# Altium PCB IO_Board.PcbDoc
Units mm, origin at the board's own origin, x right, y up, seen from the top; angles counter-clockwise.
Board outline 175 x 95 mm, 2 copper layers (Top Layer, Bottom Layer); 142 components, 107 nets, 588 pads, 75 vias.
Unrouted connection lines stored in the file: 5.
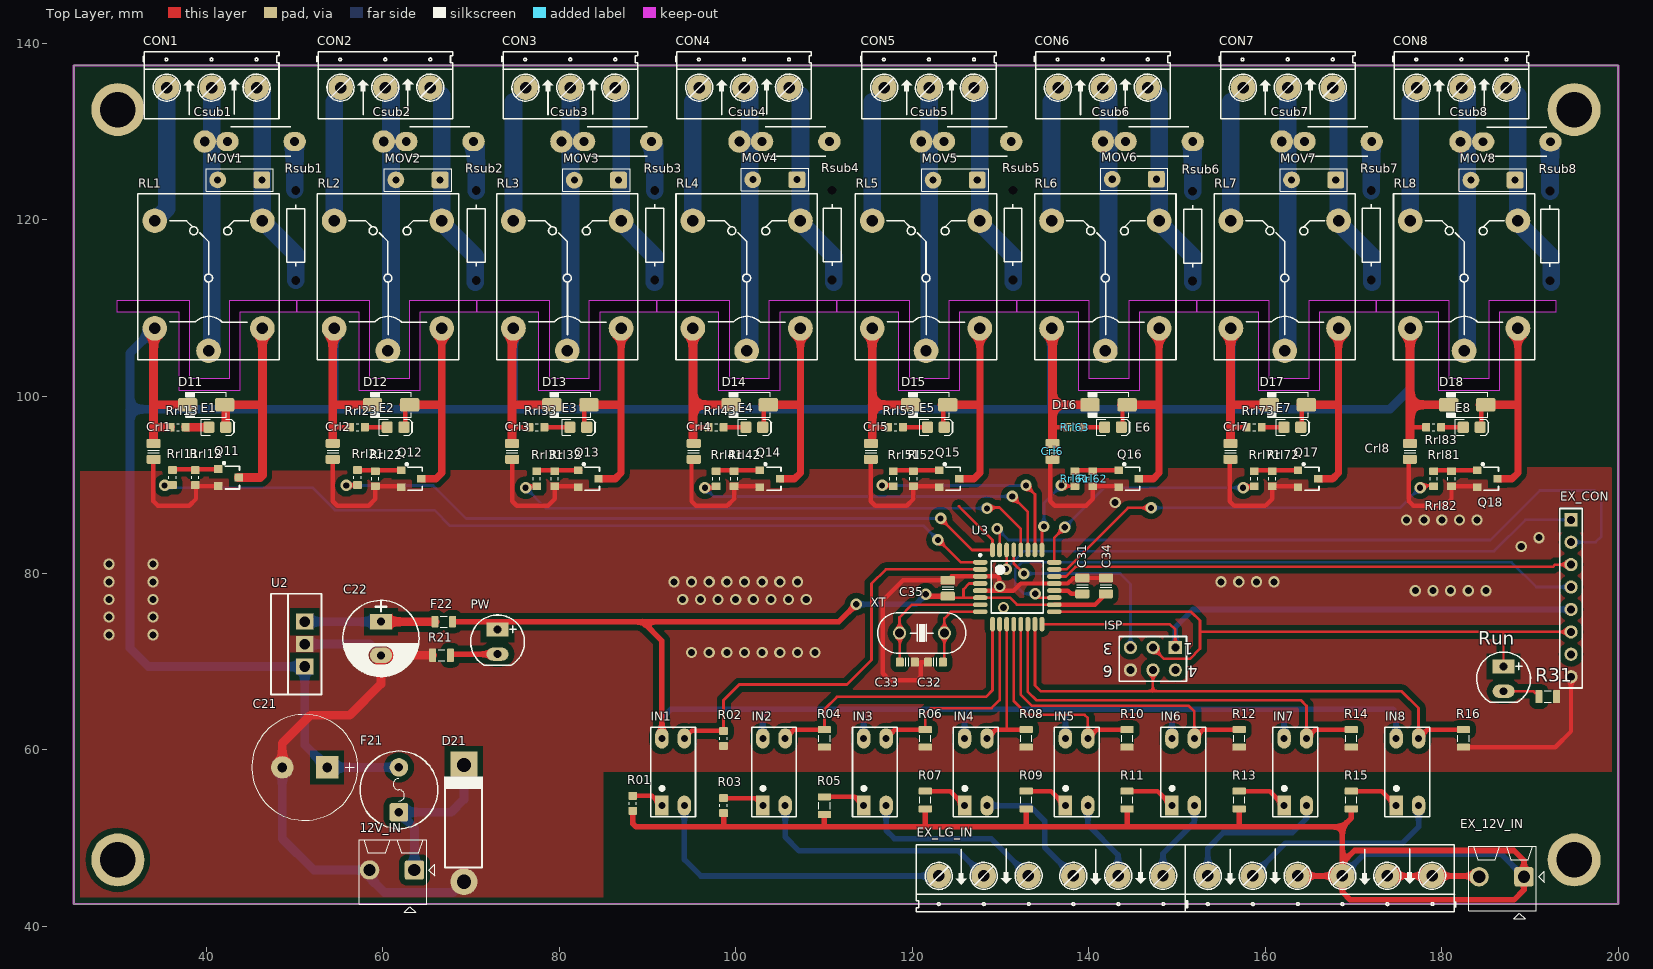
[diagram p0: Top Layer view]
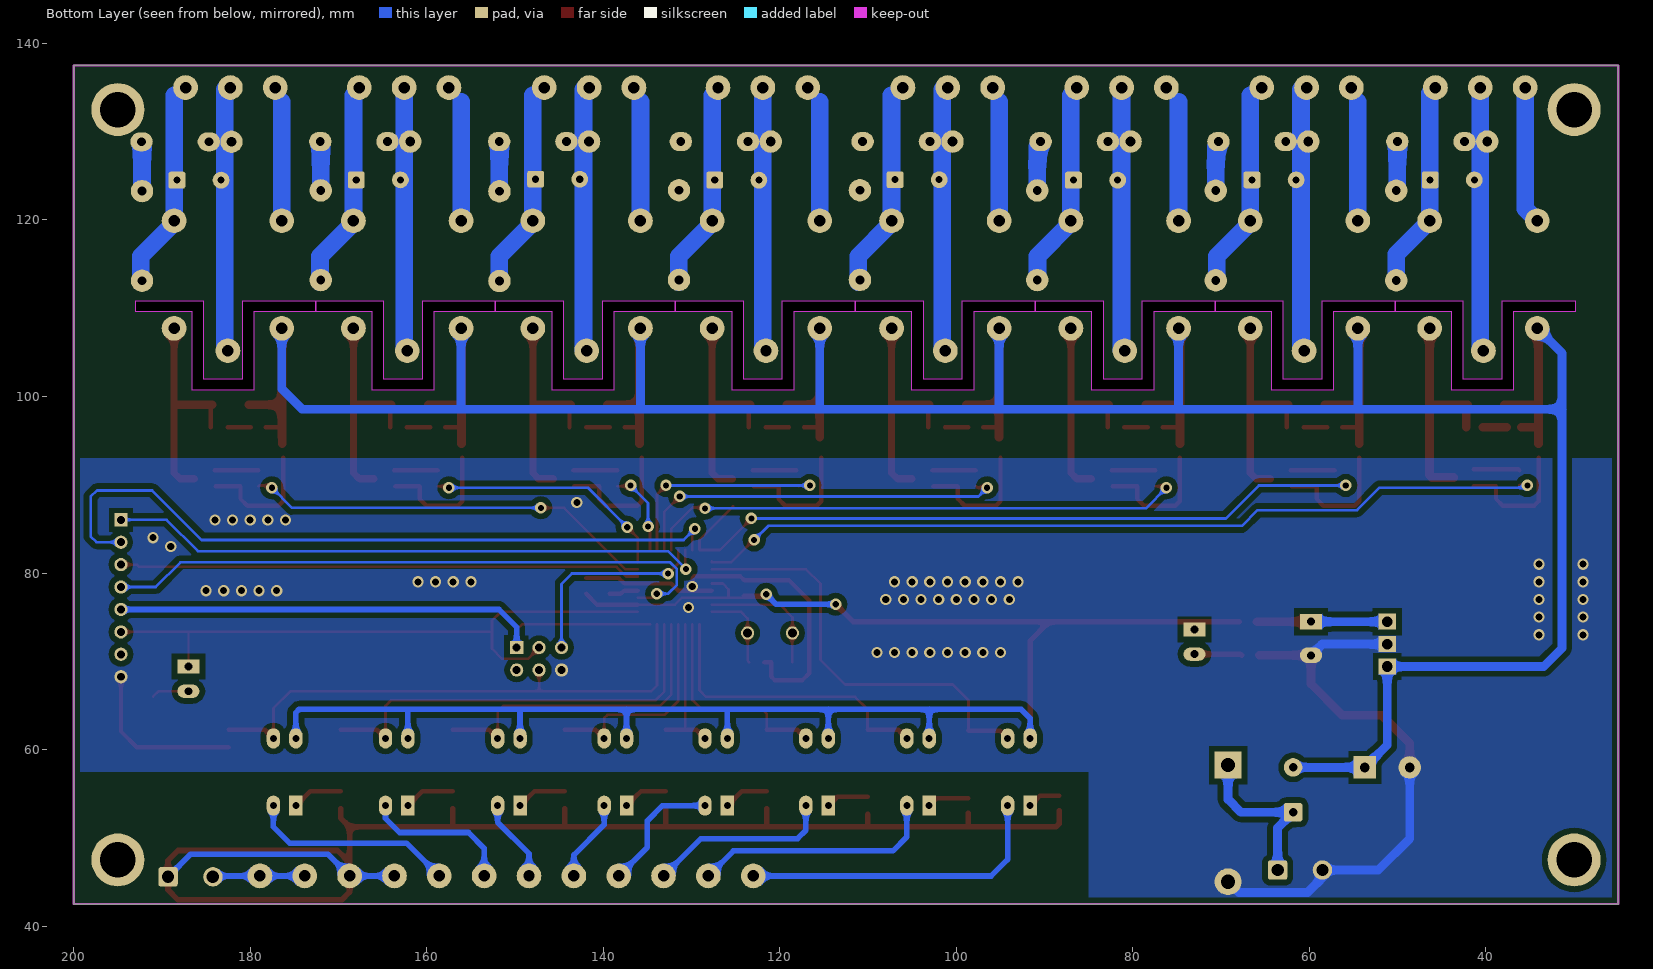
[diagram p1: Bottom Layer view, seen from below]

## Layer stack, top to bottom
Top Solder: solder mask 0.0102, Solder Resist, Dk 3.5
Top Layer: signal copper 0.0356
Dielectric 1: dielectric 0.32, FR-4, Dk 4.8
Bottom Layer: signal copper 0.0356
Bottom Solder: solder mask 0.0102, Solder Resist, Dk 3.5

## Board outline
25,42.5 200,42.5 200,137.5 25,137.5
cut-out: 172.593,109.601 179.578,109.601 179.578,100.711 186.563,100.711 186.563,109.601 192.976,109.601 192.976,110.871 185.293,110.871 185.293,101.981 180.848,101.981 180.848,110.871 172.593,110.871
cut-out: 152.209,109.601 159.195,109.601 159.195,100.711 166.179,100.711 166.179,109.601 172.593,109.601 172.593,110.871 164.909,110.871 164.909,101.981 160.464,101.981 160.464,110.871 152.209,110.871
cut-out: 131.826,109.601 138.811,109.601 138.811,100.711 145.796,100.711 145.796,109.601 152.209,109.601 152.209,110.871 144.526,110.871 144.526,101.981 140.081,101.981 140.081,110.871 131.826,110.871
cut-out: 111.442,109.601 118.427,109.601 118.427,100.711 125.412,100.711 125.412,109.601 131.826,109.601 131.826,110.871 124.142,110.871 124.142,101.981 119.697,101.981 119.697,110.871 111.442,110.871
cut-out: 91.059,109.601 98.044,109.601 98.044,100.711 105.029,100.711 105.029,109.601 111.442,109.601 111.442,110.871 103.759,110.871 103.759,101.981 99.314,101.981 99.314,110.871 91.059,110.871
cut-out: 70.675,109.601 77.66,109.601 77.66,100.711 84.645,100.711 84.645,109.601 91.059,109.601 91.059,110.871 83.376,110.871 83.376,101.981 78.93,101.981 78.93,110.871 70.675,110.871
cut-out: 50.292,109.601 57.277,109.601 57.277,100.711 64.262,100.711 64.262,109.601 70.675,109.601 70.675,110.871 62.992,110.871 62.992,101.981 58.547,101.981 58.547,110.871 50.292,110.871
cut-out: 29.909,109.601 36.893,109.601 36.893,100.711 43.878,100.711 43.878,109.601 50.292,109.601 50.292,110.871 42.608,110.871 42.608,101.981 38.163,101.981 38.163,110.871 29.909,110.871

## Design rules (kind name [scope] priority, off if disabled: settings)
Clearance [All] p1: gap=0.635
PlaneConnect [All] p1: planeconnectstyle=Direct reliefexpansion=0.508 reliefentries=4 reliefconductorwidth=0.635 reliefairgap=0.254
PolygonConnect [All] p1: connectstyle=Direct reliefconductorwidth=0.635 reliefentries=4 polygonreliefangle="90 Angle" airgapwidth=0.254
RoutingVias [All] p1: holewidth=0.711 width=1.27 viastyle="Through Hole" minholewidth=0.6 minwidth=1.2 maxholewidth=5 maxwidth=5
SolderMaskExpansion [All] p1: expansion=0.102
Width [All] p1: maxlimit=3 minlimit=0.254 preferedwidth=0.254
29 further rules are at their usual default settings.

## Components (designator, comment, footprint, x,y, rotation, side; value= is the part's Value field where it differs from the comment)
12V_IN "Stackable ScrewTerm" 2P_PCB_ScrewTerm_200mil 65,42.5 r90 top
C21 "2200uF/35V" CP_1000uF_25V 51.181,57.977 r180 top
C22 "330uF/25V" CP1.5/3.4 59.817,74.487 r270 top
C31 "Cap" CAPC2012N_F 139.268,78.537 r90 top
C32 "CAP NP" CAPC1608N 122.631,69.901 r180 top
C33 "CAP NP" CAPC1608N 119.456,69.901 r0 top
C34 "Cap" CAPC2012N_F 141.935,78.537 r90 top
C35 "Cap" CAPC2012N_F 124.028,78.283 r90 top
CON1 "3P_ScrewTerm_200mil" 3P_ScrewTerm_200mil 33.02,131.445 r0 top
CON2 "3P_ScrewTerm_200mil" 3P_ScrewTerm_200mil 52.705,131.445 r0 top
CON3 "3P_ScrewTerm_200mil" 3P_ScrewTerm_200mil 73.66,131.445 r0 top
CON4 "3P_ScrewTerm_200mil" 3P_ScrewTerm_200mil 93.345,131.445 r0 top
CON5 "3P_ScrewTerm_200mil" 3P_ScrewTerm_200mil 114.3,131.445 r0 top
CON6 "3P_ScrewTerm_200mil" 3P_ScrewTerm_200mil 133.985,131.445 r0 top
CON7 "3P_ScrewTerm_200mil" 3P_ScrewTerm_200mil 154.94,131.445 r0 top
CON8 "3P_ScrewTerm_200mil" 3P_ScrewTerm_200mil 174.625,131.445 r0 top
Crl1 "CAP NP" CAPC2012N_F 34.061,93.777 r270 top
Crl2 "CAP NP" CAPC2012N_F 54.356,93.777 r270 top
Crl3 "CAP NP" CAPC2012N_F 74.676,93.777 r270 top
Crl4 "CAP NP" CAPC2012N_F 95.25,93.777 r270 top
Crl5 "CAP NP" CAPC2012N_F 115.316,93.777 r270 top
Crl6 "CAP NP" CAPC2012N_F 135.89,93.777 r270 top
Crl7 "CAP NP" CAPC2012N_F 156.058,93.777 r270 top
Crl8 "CAP NP" CAPC2012N_F 176.378,93.777 r270 top
Csub1 "CAP NP" CAPMF12.5x4.5x9.0x10mmLS 46.228,128.88 r180 top
Csub2 "CAP NP" CAPMF12.5x4.5x9.0x10mmLS 66.497,128.88 r180 top
Csub3 "CAP NP" CAPMF12.5x4.5x9.0x10mmLS 86.639,128.88 r180 top
Csub4 "CAP NP" CAPMF12.5x4.5x9.0x10mmLS 106.807,128.88 r180 top
Csub5 "CAP NP" CAPMF12.5x4.5x9.0x10mmLS 127.406,128.88 r180 top
Csub6 "CAP NP" CAPMF12.5x4.5x9.0x10mmLS 147.98,128.88 r180 top
Csub7 "CAP NP" CAPMF12.5x4.5x9.0x10mmLS 168.25,128.88 r180 top
Csub8 "CAP NP" CAPMF12.5x4.5x9.0x10mmLS 188.493,128.854 r180 top
D11 "Diode" DO-214AC 40.005,99.06 r180 top
D12 "Diode" DO-214AC 60.96,99.06 r180 top
D13 "Diode" DO-214AC 81.28,99.06 r180 top
D14 "Diode" DO-214AC 101.6,99.06 r180 top
D15 "Diode" DO-214AC 121.92,99.06 r180 top
D16 "Diode" DO-214AC 142.24,99.06 r180 top
D17 "Diode" DO-214AC 162.56,99.06 r180 top
D18 "Diode" DO-214AC 182.88,99.06 r180 top
D21 "Diode" "Diode 3A" 69.215,51.373 r90 top
E1 "Blue" LED-0805-A 41.275,96.52 r0 top
E2 "Blue" LED-0805-A 61.468,96.52 r0 top
E3 "Blue" LED-0805-A 82.169,96.52 r0 top
E4 "Blue" LED-0805-A 102.108,96.52 r0 top
E5 "Blue" LED-0805-A 122.682,96.52 r0 top
E6 "Blue" LED-0805-A 142.748,96.52 r0 top
E7 "Blue" LED-0805-A 163.068,96.52 r0 top
E8 "Blue" LED-0805-A 183.388,96.52 r0 top
EX_12V_IN "Stackable ScrewTerm" 2P_PCB_ScrewTerm_200mil 190.703,41.735 r90 top
EX_CON "Header 8" HDR1X8 194.64,86.03 r270 top
EX_LG_IN "JP12" 12P_ScrewTerm_200mil 181.433,49.235 r180 top
F21 "1.5A" FUSE_SR-5-BK 61.849,55.437 r90 top
F22 "0.5A" RESC2012N_ZERO 66.929,74.487 r0 top
IN1 "PC817" DIP4/W0.3 91.643,53.645 r0 top
IN2 "PC817" DIP4/W0.3 103.073,53.645 r0 top
IN3 "PC817" DIP4/W0.3 114.503,53.645 r0 top
IN4 "PC817" DIP4/W0.3 125.933,53.645 r0 top
IN5 "PC817" DIP4/W0.3 137.363,53.645 r0 top
IN6 "PC817" DIP4/W0.3 149.428,53.645 r0 top
IN7 "PC817" DIP4/W0.3 162.128,53.645 r0 top
IN8 "PC817" DIP4/W0.3 174.828,53.645 r0 top
ISP "Header 3X2A" HDR2X3_CEN 149.809,71.552 r180 top
MOV1 "CAP NP" CAPC500P450250X550 43.815,124.536 r180 top
MOV2 "CAP NP" CAPC500P450250X550 64.008,124.536 r180 top
MOV3 "CAP NP" CAPC500P450250X550 84.226,124.511 r180 top
MOV4 "CAP NP" CAPC500P450250X550 104.445,124.562 r180 top
MOV5 "CAP NP" CAPC500P450250X550 124.866,124.511 r180 top
MOV6 "CAP NP" CAPC500P450250X550 145.161,124.612 r180 top
MOV7 "CAP NP" CAPC500P450250X550 165.481,124.536 r180 top
MOV8 "CAP NP" CAPC500P450250X550 185.801,124.511 r180 top
PW "Led" "LED 5mm RED" 73.025,72.201 r270 top
Q11 "C828" "SOT23 TOP" 42.545,90.805 r270 top
Q12 "C828" "SOT23 TOP" 63.246,90.678 r270 top
Q13 "C828" "SOT23 TOP" 83.312,90.678 r270 top
Q14 "C828" "SOT23 TOP" 103.886,90.678 r270 top
Q15 "C828" "SOT23 TOP" 124.206,90.678 r270 top
Q16 "C828" "SOT23 TOP" 144.526,90.678 r270 top
Q17 "C828" "SOT23 TOP" 164.846,90.678 r270 top
Q18 "C828" "SOT23 TOP" 185.166,90.678 r270 top
R01 "Res" RESC1608N_ZERO 88.341,53.899 r270 top
R02 "Res" RESC1608N_ZERO 98.628,61.265 r90 top
R03 "Res" RESC1608N_ZERO 98.628,53.645 r270 top
R04 "Res" RESC2012N_F 110.058,61.265 r90 top
R05 "Res" RESC2012N_F 110.058,53.645 r270 top
R06 "Res" RESC2012N_F 121.488,61.265 r90 top
R07 "Res" RESC2012N_F 121.488,54.28 r270 top
R08 "Res" RESC2012N_F 132.918,61.265 r90 top
R09 "Res" RESC2012N_F 132.918,54.28 r270 top
R10 "Res" RESC2012N_F 144.348,61.265 r90 top
R11 "Res" RESC2012N_F 144.348,54.28 r270 top
R12 "Res" RESC2012N_F 157.048,61.265 r90 top
R13 "Res" RESC2012N_F 157.048,54.28 r270 top
R14 "Res" RESC2012N_F 169.748,61.265 r90 top
R15 "Res" RESC2012N_F 169.748,54.28 r270 top
R16 "Res" RESC2012N_F 182.448,61.265 r90 top
R21 "Res_0805_1k" RESC2012N_F 66.675,70.677 r180 top
R31 "Res_0805_1k" RESC2012N_F 192,66 r0 top
RL1 "Relay 10A/5V" RL_5PIN 48.26,104.14 r90 top
RL2 "Relay 10A/5V" RL_5PIN 68.58,104.14 r90 top
RL3 "Relay 10A/5V" RL_5PIN 88.9,104.14 r90 top
RL4 "Relay 10A/5V" RL_5PIN 109.22,104.14 r90 top
RL5 "Relay 10A/5V" RL_5PIN 129.54,104.14 r90 top
RL6 "Relay 10A/5V" RL_5PIN 149.86,104.14 r90 top
RL7 "Relay 10A/5V" RL_5PIN 170.18,104.14 r90 top
RL8 "Relay 10A/5V" RL_5PIN 190.5,104.14 r90 top
Rl52 "Res" RESC1608N_ZERO 120.142,90.678 r90 top
Rrl11 "Res" RESC1608N_ZERO 36.195,90.805 r90 top
Rrl12 "Res" RESC1608N_ZERO 38.77,90.805 r90 top
Rrl13 "Res" RESC1608N_ZERO 36.83,96.52 r180 top
Rrl21 "Res" RESC1608N_ZERO 57.15,90.805 r90 top
Rrl22 "Res" RESC1608N_ZERO 59.182,90.678 r90 top
Rrl23 "Res" RESC1608N_ZERO 57.15,96.52 r180 top
Rrl31 "Res" RESC1608N_ZERO 77.47,90.678 r90 top
Rrl32 "Res" RESC1608N_ZERO 79.502,90.678 r90 top
Rrl33 "Res" RESC1608N_ZERO 77.47,96.52 r180 top
Rrl41 "Res" RESC1608N_ZERO 97.79,90.678 r90 top
Rrl42 "Res" RESC1608N_ZERO 99.822,90.678 r90 top
Rrl43 "Res" RESC1608N_ZERO 97.79,96.52 r180 top
Rrl51 "Res" RESC1608N_ZERO 117.856,90.678 r90 top
Rrl53 "Res" RESC1608N_ZERO 118.11,96.52 r180 top
Rrl61 "Res" RESC1608N_ZERO 138.43,90.678 r90 top
Rrl62 "Res" RESC1608N_ZERO 140.462,90.678 r90 top
Rrl63 "Res" RESC1608N_ZERO 138.43,96.52 r180 top
Rrl71 "Res" RESC1608N_ZERO 158.75,90.678 r90 top
Rrl72 "Res" RESC1608N_ZERO 160.782,90.678 r90 top
Rrl73 "Res" RESC1608N_ZERO 158.75,96.52 r180 top
Rrl81 "Res" RESC1608N_ZERO 179.07,90.678 r90 top
Rrl82 "Res" RESC1608N_ZERO 181.102,90.678 r90 top
Rrl83 "Res" RESC1608N_ZERO 179.07,96.52 r180 top
Rsub1 "Res" RESTH_AXIAL-0.4 50.165,118.237 r270 top
Rsub2 "Res" RESTH_AXIAL-0.4 70.612,118.237 r270 top
Rsub3 "Res" RESTH_AXIAL-0.4 90.83,118.262 r270 top
Rsub4 "Res" RESTH_AXIAL-0.4 110.922,118.288 r270 top
Rsub5 "Res" RESTH_AXIAL-0.4 131.42,118.288 r270 top
Rsub6 "Res" RESTH_AXIAL-0.4 151.765,118.161 r270 top
Rsub7 "Res" RESTH_AXIAL-0.4 172.009,118.262 r270 top
Rsub8 "Res" RESTH_AXIAL-0.4 192.253,118.186 r270 top
Run "Led" "LED 5mm RED" 187,68 r270 top
U2 "LM7805" TO-220 51.181,71.947 r90 top
U3 "ATmega88PA" 32PIN 131.902,78.41 r0 top
XT "20MHz" XT2 121.107,73.203 r0 top

## Footprints (in the part's own frame and the unit in brackets; to place one, negate y for a bottom-side part, rotate by r counter-clockwise, add the part's x,y. Pads: shape width x height; smd on the part's side, far side on the other; paste and mask are expansions set on the pad)
2P_PCB_ScrewTerm_200mil [mm]
  rrect25% 2.2x2.2 hole 1.4: 1(3.85,1.397)
  round 2.2 hole 1.4: 2(3.85,6.477)
  silkscreen extent -0.93,-0.89 7.3,7.66, body extent 0,0 7.3,7.62, height 8.5
3P_ScrewTerm_200mil [mil]
  round 110 hole 51.18: 1(100,140) 2(300,140) 3(500,140)
  silkscreen extent -6,0 600,300, body extent 5,0 595,295, height 394
12P_ScrewTerm_200mil [mil]
  round 110 hole 51.18: 1(100,140) 2(300,140) 3(500,140) 4(700,140) 5(900,140) 6(1100,140) 7(1300,140) 8(1500,140) 9(1700,140) 10(1900,140) 11(2100,140) 12(2300,140)
  silkscreen extent -6,0 2400,300, body extent 5,0 2395,295, height 394
32PIN [mm]
  oval 1.65x0.55 smd: 1(-4.2,2.8) 2(-4.2,2) 3(-4.2,1.2) 4(-4.2,0.4) 5(-4.2,-0.4) 6(-4.2,-1.2) 7(-4.2,-2) 8(-4.2,-2.8) 17(4.2,-2.8) 18(4.2,-2) 19(4.2,-1.2) 20(4.2,-0.4) 21(4.2,0.4) 22(4.2,1.2) 23(4.2,2) 24(4.2,2.8)
  oval 0.55x1.65 smd: 9(-2.8,-4.2) 10(-2,-4.2) 11(-1.2,-4.2) 12(-0.4,-4.2) 13(0.4,-4.2) 14(1.2,-4.2) 15(2,-4.2) 16(2.8,-4.2) 25(2.8,4.2) 26(2,4.2) 27(1.2,4.2) 28(0.4,4.2) 29(-0.4,4.2) 30(-1.2,4.2) 31(-2,4.2) 32(-2.8,4.2)
  silkscreen extent -4.32,-2.95 2.95,3.75, body extent -4.5,-4.5 4.5,4.5, height 1.6
CAPC500P450250X550 [mm] "TDK FK24 radial ceramic capacitor"
  round 0.508 on Mech14: 0(0,0)
  rrect25% 1.905x1.905 hole 0.8: 1(-2.5,0)
  round 1.905 hole 0.8: 2(2.5,0)
  silkscreen extent -3.81,-1.27 3.81,1.27, body extent -2.8,-1 2.8,1, height 5.47
CAPC1608N [mm] "Chip Capacitor, Body 1.6x0.8mm, 0603, IPC Medium Density"
  round 0.254 on Mech14: 0(0,0)
  rrect25% 0.9x1 smd: 1(-0.85,0) 2(0.85,0)
  Top Layer pour cut-out: -0.4,0.6 0.4,0.6 0.4,-0.6 -0.4,-0.6
  silkscreen extent -0.18,-0.48 0.18,0.48, body extent -0.85,-0.45 0.85,0.45, height 0.89
CAPC2012N_F [mm] "Chip Capacitor, Body 2.0x1.2mm, 0805, IPC Medium Density, for Flex circuits"
  round 0.254 on Mech14: 0(0,0)
  rrect25% 1.2x1.4 on Top Solder: 1(-0.9,0) 1(0.9,0)
  rrect25% 1x1.6 smd paste-1: 1(-0.9,0) 2(0.9,0)
  rrect25% 1x1.4 on Top Paste: 1(-0.9,0) 1(0.9,0)
  Top Layer pour cut-out: -0.4,0.8 0.4,0.8 0.4,-0.8 -0.4,-0.8
  silkscreen extent -0.15,-0.65 0.15,0.65, body extent -1.1,-0.72 1.1,0.73, height 1.34
CAPMF12.5x4.5x9.0x10mmLS [mm] "Capacitor, MF, Thru-Hole, Dipped Radial; Body 12.5 x 4.5 x 9.0 mm (WxTxH) Pin Spacing 10.0 mm (typ)"
  oval 2.54x2.159 hole 1: 1(-3.81,0) 2(3.81,0)
  round 2.54 hole 1.1: 2(6.375,0)
  silkscreen extent -3.37,-1.65 3.43,1.65, body extent -4.98,-2.25 7.52,2.25, height 9
CP1.5/3.4 [mm] "Tu hoa 220->470uF,16V, 470uF/16V,25V"
  rect 1.778x2.54 hole 0.9: 1(0,0)
  oval 1.778x2.54 hole 0.9: 2(3.81,0)
  silkscreen extent -2.41,-4.32 6.22,4.32, body extent -2.16,-4 5.84,4, height 11.33
CP_1000uF_25V [mm]
  rect 2.54x2.54 hole 1.1: 1(-2.54,0)
  round 2.54 hole 1.1: 2(2.54,0)
  silkscreen extent -6,-6 6,6, body extent -6,-6 6.02,6, height 20.1
"Diode 3A" [mil] "Diode Schottky 1N5822"
  round 120 hole 62.99: 1(-250,0)
  rect 120x120 hole 62.99: 2(270,0)
  silkscreen extent -186,-85 219,90, body extent -321,-104 321,104, height 248
DIP4/W0.3 [mil] "PC817"
  rect 60x90 hole 31.5: 1(0,0)
  oval 60x90 hole 31.5: 2(100,0) 3(100,300) 4(0,300)
  silkscreen extent -50,-50 150,350, body extent -40,-5 140,305, height 169
DO-214AC [mm] "JEDEC DO214 variation AC. SMA"
  round 0.508 on Mech14: 0(0,0)
  rrect25% 2.2x1.5 smd: A(-2.1,0) K(2.1,0)
  silkscreen extent -2.3,-1.4 2.3,1.4, body extent -2.6,-1.3 2.6,1.3, height 2.42
FUSE_SR-5-BK [mm]
  round 0.5 on Mech14: 0(0,0)
  rrect25% 2.1x2.1 hole 0.965: 1(-2.54,0)
  round 2.1 hole 0.965: 2(2.54,0)
  silkscreen extent -4.4,-4.4 4.4,4.4, body extent -4.35,-4.32 4.35,4.32, height 8.29
HDR1X8 [mm] "Connector; Header; 8 Position"
  rect 1.5x1.5 hole 0.9: 1(0,0)
  round 1.5 hole 0.9: 2(2.54,0) 3(5.08,0) 4(7.62,0) 5(10.16,0) 6(12.7,0) 7(15.24,0) 8(17.78,0)
  silkscreen extent -1.27,-1.27 19.05,1.27, body extent -1.27,-1.27 19.05,1.27, height 7
HDR2X3_CEN [mm] "Connector; Header; 3x2 Position"
  rect 1.5x1.5 hole 0.9: 1(0,0)
  round 1.5 hole 0.9: 2(2.54,0) 3(5.08,0) 4(0,2.54) 5(2.54,2.54) 6(5.08,2.54)
  silkscreen extent -1.27,-1.27 6.35,3.81
"LED 5mm RED" [mm]
  rect 1.6x2.5 hole 0.9: A(-1.397,0)
  oval 1.5x2.5 hole 0.9: K(1.397,0)
  silkscreen extent -3.04,-3.05 2.64,3.04, body extent -2.94,-2.97 2.48,3.05, height 12.31
LED-0805-A [mil]
  round 20 on Mech14: 0(0,0)
  rrect25% 50x50 smd: A(-37.5,0) K(37.5,0)
  Top Layer pour cut-out: -15,30 15,30 15,-30 -15,-30
  silkscreen extent -72,-35 77,35, body extent -39,-25 39,25, height 31
RESC1608N_ZERO [mm] "Chip Resistor, Body 1.6x0.8mm, 0603, IPC Medium Density"
  round 0.254 on Mech14: 0(0,0)
  rrect25% 0.9x1 smd: 1(-0.85,0) 2(0.85,0)
  Top Layer pour cut-out: -0.4,0.6 0.4,0.6 0.4,-0.6 -0.4,-0.6
  silkscreen extent -0.15,-0.41 0.15,0.41, body extent -0.87,-0.47 0.88,0.48, height 0.54
RESC2012N_F [mm] "Chip Resistor, Body 2.0x1.2mm, 0805, IPC Medium Density"
  round 0.254 on Mech14: 0(0,0)
  rrect25% 1x1.3 on Top Solder: 1(-1,0) 1(1,0)
  rrect25% 0.8x1.5 smd paste-1: 1(-1,0) 2(1,0)
  rrect25% 0.8x1.3 on Top Paste: 1(-1,0) 1(1,0)
  Top Layer pour cut-out: -0.6,0.75 0.6,0.75 0.6,-0.75 -0.6,-0.75
  silkscreen extent -0.38,-0.64 0.38,0.64, body extent -1.1,-0.67 1.1,0.68, height 0.69
RESC2012N_ZERO [mm] "Chip Resistor, Body 2.0x1.2mm, 0805, IPC Medium Density"
  round 0.254 on Mech14: 0(0,0)
  rrect25% 0.8x1.3 smd: 1(-1,0) 2(1,0)
  Top Layer pour cut-out: -0.6,0.75 0.6,0.75 0.6,-0.75 -0.6,-0.75
  silkscreen extent -0.38,-0.64 0.38,0.64, body extent -1.1,-0.67 1.1,0.68, height 0.69
RESTH_AXIAL-0.4 [mm]
  round 0 / inner round 0 / far side round 2.54 hole 1 unplated: 1(-5.08,0) 2(5.08,0)
  silkscreen extent -3.5,-1.02 3.5,1.02, body extent -5.38,-1.28 5.38,1.28, height 2.6
RL_5PIN [mm]
  round 2.8 hole 1.3: 1(1.041,7.976) 2(15.773,14.072) 3(15.773,1.88) 4(3.581,1.88) 5(3.581,14.072)
  silkscreen extent 0.03,-0.03 18.82,15.98, body extent -0.18,0.2 18.82,15.7, height 15.5
"SOT23 TOP" [mm]
  rect 0.9x0.95 smd: 1(-0.965,-1.143) 2(0,1.143) 3(0.965,-1.143)
  silkscreen extent -1.77,-0.63 1.3,1.25, body extent -1.46,-1.17 1.46,1.17, height 1
TO-220 [mm]
  rect 1.8x2 hole 1.2: 1(-2.54,0) 2(0,0) 3(2.54,0)
  silkscreen extent -5.71,-1.91 5.71,3.81, body extent -4.92,-2.13 4.98,2.37, height 8.08
XT2 [mm]
  round 1.5 hole 1: 1(-2.54,0) 2(2.54,0)
  silkscreen extent -5.03,-2.29 4.96,2.29, body extent -5.93,-2.36 5.42,2.29, height 3.5

## Part data
12V_IN EX_12V_IN: library part 2P_ScrewTerm_90S_3.81MM, "Terminal Block Screw Type THT 2-Position 3.81mm pitch"
C21 C22: library part CP4, "Cap 1000uF/16V - 220uF/50V"
E1 E2 E3 E4 E5 E6 E7 E8: library part LED_SMD_Blue_0805_100mcd, "LED 0805 SMD Blue 100mcd 470nm"
EX_CON: "Header, 8-Pin"
EX_LG_IN: library part Con12, "Connector 12"
F21 F22: library part Fuse
IN1 IN2 IN3 IN4 IN5 IN6 IN7 IN8: library part Opto
ISP: "Header, 3-Pin, Dual row"
Q11 Q12 Q13 Q14 Q15 Q16 Q17 Q18: library part NPN, "Transistor C828 C1815...."
R21 R31: library part Res
RL1 RL2 RL3 RL4 RL5 RL6 RL7 RL8: library part "Relay 1", "Relay SPDT,10A - 12VDC 5 Pin"
U2: library part LM78xx
U3: library part ATmega48/168/328, "ATmega48/168/328"
XT: library part Crystal

## Free pads (board coordinates)
  round 6 hole 4: 0(195,132.5) 1(195,47.5) 2(30,132.5) 3(30,47.5)

## Via types
v1: diameter 1.27, hole 0.8, Top Layer to Bottom Layer, tented both sides, 53 vias
v2: diameter 1.3, hole 0.7, Top Layer to Bottom Layer, 22 vias

## Nets (pads, with @x,y where several pads share a name; then routed paths per layer and width w, separated by ;. In a path a pad name is that pad's centre, name@x,y a point inside that pad or via, vN(x,y) a via of type N, cw(c..) or ccw(c..) an arc to the next point about the centre after c; other vN are vias at no path point)
+5V: C22.1 F22.1 U2.3 | length 14.7
  Top Layer w1: C22.1 F22.1
  Bottom Layer w1: U2.3 C22.1
+12_EX: EX_12V_IN.1 EX_LG_IN.3 EX_LG_IN.4 R01.2 R03.2 R05.2 R07.2 R09.2 R11.2 R13.2 R15.2 | length 182.3
  Top Layer w0.635: R01.2 88.341,51.613 88.721,51.233 110.185,51.233 ; 98.628,51.36 R03.2 ; R05.2 110.058,51.36 110.185,51.233 ; R07.2 121.488,51.36 121.615,51.233 ; R09.2 132.918,51.36 132.791,51.233 ; R11.2 144.348,51.36 144.221,51.233 ; R13.2 157.048,51.36 157.175,51.233 ; EX_LG_IN.4 EX_LG_IN.3 ; R15.2 169.748,52.248 168.733,51.233 ; 110.185,51.233 121.615,51.233 ; 121.615,51.233 132.791,51.233 ; 132.791,51.233 144.221,51.233 ; 144.221,51.233 157.175,51.233 ; 157.175,51.233 168.733,51.233 ; EX_LG_IN.3 168.733,47.169 ; EX_LG_IN.3 168.733,43.865 169.621,42.977 188.163,42.977 189.306,44.12 EX_12V_IN.1 189.306,47.422 188.163,48.565 170.129,48.565 168.733,47.169 ; 168.733,47.169 168.733,51.233
  Bottom Layer w0.635: EX_LG_IN.4 EX_LG_IN.3 171.187,48.133 186.758,48.133 EX_12V_IN.1
+12V: C21.1 Crl1.1@34.061,94.677 Crl2.1@54.356,94.677 Crl3.1@74.676,94.677 Crl4.1@95.25,94.677 Crl5.1@115.316,94.677 Crl6.1@135.89,94.677 Crl7.1@156.058,94.677 Crl8.1@176.378,94.677 D11.K D12.K D13.K D14.K D15.K D16.K D17.K D18.K F21.2 RL1.5 RL2.5 RL3.5 RL4.5 RL5.5 RL6.5 RL7.5 RL8.5 Rrl13.2 Rrl23.2 Rrl33.2 Rrl43.2 Rrl53.2 Rrl63.2 Rrl73.2 Rrl83.2 U2.1 | length 445.9
  Top Layer w0.5: 54.508,96.52 Rrl23.2 ; 74.828,96.52 Rrl33.2 ; 95.148,96.52 Rrl43.2 ; 115.468,96.52 Rrl53.2 ; 135.89,96.52 Rrl63.2 ; 156.108,96.52 Rrl73.2 ; 176.428,96.52 Rrl83.2
  Top Layer w1: Crl1.1@34.061,94.677 34.061,107.594 RL1.5 ; 34.188,96.52 Rrl13.2 ; 34.188,99.06 D11.K ; Crl2.1@54.356,94.677 54.356,107.569 RL2.5 ; 54.508,99.06 D12.K@58.225,99.06 ; Crl3.1@74.676,94.677 74.676,107.569 RL3.5 ; 74.828,99.06 D13.K@78.545,99.06 ; 95.148,95.402 95.148,96.52 95.148,99.06 ; RL4.5 95.148,99.06 ; D14.K@98.865,99.06 95.148,99.06 ; 115.468,95.402 115.468,96.52 115.468,99.06 ; RL5.5 115.468,99.06 ; D15.K@119.185,99.06 115.468,99.06 ; RL6.5 135.89,107.62 135.89,99.06 ; Crl6.1@135.89,94.677 135.89,96.52 135.89,99.06 ; D16.K@139.505,99.06 135.89,99.06 ; Crl7.1@156.058,94.677 156.058,107.671 RL7.5 ; 156.108,99.06 D17.K@159.825,99.06 ; Crl8.1@176.378,94.677 RL8.5@176.378,107.671 ; 176.428,95.402 176.428,96.52 176.428,99.06 ; RL8.5 176.428,99.06 ; D18.K@180.145,99.06 176.428,99.06
  Bottom Layer w1: RL1.5 31.369,104.902 31.369,98.552 ; RL2.5 54.508,98.654 54.61,98.552 ; F21.2 C21.1 51.181,60.517 U2.1 33.463,69.407 31.369,71.501 31.369,98.552 ; RL3.5 74.828,98.577 74.803,98.552 ; RL4.5 95.148,98.654 95.25,98.552 ; RL5.5 115.468,98.577 115.443,98.552 ; RL6.5 135.788,98.577 135.814,98.552 ; 156.108,98.654 RL7.5 ; RL8.5 176.428,100.863 174.117,98.552 135.814,98.552 ; 31.369,98.552 54.61,98.552 ; 54.61,98.552 74.803,98.552 ; 74.803,98.552 95.25,98.552 ; 95.25,98.552 115.443,98.552 ; 115.443,98.552 135.814,98.552
ADC6: EX_CON.4 U3.19 | length 71.3
  Top Layer w0.305: v2(133.934,77.648) 134.372,77.21 U3.19
  Bottom Layer w0.305: v2(133.934,77.648) 132.664,77.648 131.659,78.653 131.659,80.452 132.41,81.204 187.909,81.204 190.703,78.41 EX_CON.4
ADC7: EX_CON.3 U3.22 | length 59.1
  Top Layer w0.305: U3.22 137.42,79.61 138.506,80.696 192.583,80.696 192.837,80.95 EX_CON.3
AREF: C31.1@139.268,77.637 U3.20 | length 3.3
  Top Layer w0.5: U3.20 137.636,78.01 138.009,77.637 C31.1@139.268,77.637
EX_IN_1: EX_LG_IN.12 IN1.2 | length 35.7
  Bottom Layer w0.635: IN1.2 94.183,47.549 96.053,45.679 EX_LG_IN.12
EX_IN_2: EX_LG_IN.11 IN2.2 | length 27.9
  Bottom Layer w0.635: IN2.2 105.613,50.089 107.188,48.514 125.258,48.514 EX_LG_IN.11
EX_IN_3: EX_LG_IN.10 IN3.2 | length 21.1
  Bottom Layer w0.635: IN3.2 117.043,50.851 117.983,49.911 128.941,49.911 EX_LG_IN.10
EX_IN_4: EX_LG_IN.9 IN4.2 | length 14.8
  Bottom Layer w0.635: IN4.2 133.299,53.645 135.019,51.925 135.019,48.913 EX_LG_IN.9
EX_IN_5: EX_LG_IN.8 IN5.2 | length 9.4
  Bottom Layer w0.635: IN5.2 139.903,51.486 143.333,48.056 EX_LG_IN.8
EX_IN_6: EX_LG_IN.7 IN6.2 | length 9.4
  Bottom Layer w0.635: EX_LG_IN.7 148.413,48.21 151.968,51.765 IN6.2
EX_IN_7: EX_LG_IN.6 IN7.2 | length 17.2
  Bottom Layer w0.635: EX_LG_IN.6 153.493,48.82 155.27,50.597 163.068,50.597 164.668,52.197 IN7.2
EX_IN_8: EX_LG_IN.5 IN8.2 | length 23.5
  Bottom Layer w0.635: EX_LG_IN.5 162.297,49.403 175.539,49.403 177.368,51.232 IN8.2
GND: 12V_IN.2 C21.2 C22.2 C31.2 C32.2 C33.2 C34.2 C35.2 Crl1.2 Crl2.2 Crl3.2 Crl4.2 Crl5.2 Crl6.2 Crl7.2 Crl8.2 D21.1 EX_CON.8 ISP.6 Q11.3 Q12.3 Q13.3 Q14.3 Q15.3 Q16.3 Q17.3 Q18.3 R02.1 R04.1@110.058,60.265 R06.1@121.488,60.265 R08.1@132.918,60.265 R10.1@144.348,60.265 R12.1@157.048,60.265 R14.1@169.748,60.265 R16.1@182.448,60.265 R21.2 R31.2 Rl52.1 Rrl12.1 Rrl22.1 Rrl32.1 Rrl42.1 Rrl62.1 Rrl72.1 Rrl82.1 U2.2 U3.3 U3.5 U3.21 | length 248.4
  Top Layer w0.5: Crl1.2@34.036,93.08 34.036,88.138 34.544,87.63 38.1,87.63 38.862,88.392 38.862,89.817 38.885,89.84 Q11.3 ; Crl2.2@54.356,93.08 54.356,88.138 54.864,87.63 58.42,87.63 59.182,88.392 Rrl22.1 Q12.3@61.988,89.828 ; Crl3.2@74.676,93.08 74.676,88.138 75.184,87.63 78.74,87.63 79.502,88.392 Rrl32.1 Q13.3@82.308,89.828 ; Crl4.2@94.996,93.08 94.996,88.138 95.504,87.63 99.06,87.63 99.822,88.392 Rrl42.1 Q14.3@102.628,89.828 ; Crl5.2@115.316,93.08 115.316,88.138 115.824,87.63 119.38,87.63 120.142,88.392 Rl52.1 Q15.3@122.948,89.828 ; C32.2 120.98,69.901 120.98,68.25 120.599,67.869 117.424,67.869 116.662,68.631 116.662,76.886 118.959,79.183 C35.2 124.455,79.61 U3.3 129.686,79.61 129.87,79.426 v1@129.87,78.01 ; U3.5 v1@129.87,78.01 ; Crl6.2@135.636,93.08 135.636,88.138 136.144,87.63 139.7,87.63 140.462,88.392 Rrl62.1 Q16.3@143.268,89.828 ; C34.2 C31.2 138.263,79.437 137.636,78.81 U3.21 132.302,78.81 131.502,78.01 v1@129.87,78.01 ; Crl7.2@155.956,93.08 155.956,88.138 156.464,87.63 160.02,87.63 160.782,88.392 Rrl72.1 Q17.3@163.588,89.828 ; Crl8.2@176.276,93.08 176.276,88.138 176.784,87.63 180.34,87.63 181.102,88.392 Rrl82.1 Q18.3@183.908,89.828 ; R16.1@182.448,60.265 192.853,60.265 194.64,62.052 EX_CON.8
  Top Layer w1: C21.2 48.641,60.706 51.816,63.881 56.261,63.881 59.817,67.437 C22.2 R21.2
  Bottom Layer w1: C21.2 48.641,49.911 52.202,46.35 12V_IN.2 58.523,45.49 60.198,43.815 68.007,43.815 D21.1 ; U2.2 58.547,71.947 C22.2
  other v1: 95,71 97,71 99,71 101,71 103,71 105,71 107,71 109,71 29,73 34,73 29,75 34,75 130.327,76.098 29,77 34,77 94,77 96,77 98,77 100,77 102,77 104,77 106,77 108,77 177,78 179,78 181,78 183,78 185,78 129.921,78.461 29,79 34,79 93,79 95,79 97,79 99,79 101,79 103,79 105,79 107,79 155,79 157,79 159,79 161,79 29,81 34,81 189,83 191,84 176,86 178,86 180,86 182,86 184,86 143,88
GND_EX: EX_12V_IN.2 EX_LG_IN.1 EX_LG_IN.2 | length 20.8
  Top Layer w0.635: EX_LG_IN.2 EX_LG_IN.1 184.132,45.679 EX_12V_IN.2
  Bottom Layer w0.635: EX_LG_IN.2 EX_LG_IN.1 EX_12V_IN.2@184.132,45.679
LG_IN_1: IN1.3 R02.2 U3.2 | length 48.5
  Top Layer w0.305: R02.2 98.628,65.583 100.406,67.361 112.598,67.361 115.392,70.155 115.392,78.791 117.011,80.41 U3.2
  Top Layer w0.5: IN1.3 95.033,62.115 R02.2
LG_IN_2: IN2.3 R04.2 U3.9 | length 34.6
  Top Layer w0.305: R04.2 110.058,64.567 111.455,65.964 128.346,65.964 129.102,66.72 U3.9
  Top Layer w0.5: IN2.3 106.613,62.265 R04.2
LG_IN_3: IN3.3 R06.2 U3.10 | length 24.3
  Top Layer w0.305: R06.2 121.488,64.059 122.123,64.694 128.981,64.694 129.902,65.615 U3.10
  Top Layer w0.5: IN3.3 118.043,62.265 R06.2
LG_IN_4: IN4.3 R08.2 U3.11 | length 16.8
  Top Layer w0.305: U3.11 130.702,62.322 130.759,62.265
  Top Layer w0.5: IN4.3 129.473,62.265 130.759,62.265 R08.2
LG_IN_5: IN5.3 R10.2 U3.12 | length 25.1
  Top Layer w0.305: U3.12 131.502,65.475 133.045,63.932 139.522,63.932 139.903,63.551 IN5.3
  Top Layer w0.5: IN5.3 140.903,62.265 R10.2
LG_IN_6: IN6.3 R12.2 U3.13 | length 37
  Top Layer w0.305: U3.13 132.302,66.199 133.553,64.948 151.333,64.948 151.968,64.313 IN6.3
  Top Layer w0.5: IN6.3 152.968,62.265 R12.2
LG_IN_7: IN7.3 R14.2 U3.14 | length 49.1
  Top Layer w0.305: U3.14 133.102,66.542 134.061,65.583 164.033,65.583 164.668,64.948 IN7.3
  Top Layer w0.5: IN7.3 165.668,62.265 R14.2
LG_IN_8: IN8.3 ISP.5 R16.2 U3.15 | length 62.8
  Top Layer w0.305: U3.15 133.902,67.266 134.569,66.599 147.269,66.599 ; ISP.5 147.269,66.599 ; IN8.3 177.368,64.694 175.463,66.599 147.269,66.599
  Top Layer w0.5: IN8.3 178.368,62.265 R16.2
MCU_RX: EX_CON.1 U3.30 | length 68.5
  Top Layer w0.305: v2(130.632,80.442) 130.702,80.512 U3.30
  Bottom Layer w0.305: v2(130.632,80.442) 132.664,82.474 185.903,82.474 189.459,86.03 EX_CON.1
MCU_TX: EX_CON.2 U3.31 | length 82.3
  Top Layer w0.305: v2(129.616,85.014) 129.902,84.728 U3.31
  Bottom Layer w0.305: v2(129.616,85.014) 130.886,83.744 185.496,83.744 191.11,89.357 197.358,89.357 198.069,88.646 198.069,84.15 197.409,83.49 EX_CON.2
MISO: EX_CON.5 ISP.1 U3.16 | length 65.4
  Top Layer w0.305: U3.16 149.174,74.21 149.809,73.575 ISP.1
  Bottom Layer w0.635: ISP.1 149.809,73.863 151.816,75.87 EX_CON.5
Net12V_IN_1: 12V_IN.1 D21.2 F21.1 | length 19.1
  Bottom Layer w1: 12V_IN.1 63.603,51.143 F21.1 67.756,52.897 69.215,54.356 D21.2
NetCON1_1: CON1.1 RL1.2 | length 15.7
  Bottom Layer w2: RL1.2 35.56,121.285 CON1.1
NetCON1_2: CON1.2 Csub1.2 MOV1.2 RL1.1 | length 30
  Bottom Layer w2: RL1.1 40.64,105.537 CON1.2
NetCON1_3: CON1.3 MOV1.1 RL1.3 Rsub1.2 | length 23.7
  Bottom Layer w2: CON1.3 46.38,134.341 RL1.3 50.165,116.129 Rsub1.2
NetCON2_1: CON2.1 RL2.2 | length 13.7
  Bottom Layer w2: RL2.2@54.508,119.685 54.508,133.401
NetCON2_2: CON2.2 Csub2.2 MOV2.2 RL2.1 | length 29.5
  Bottom Layer w2: RL2.1@60.96,105.308 CON2.2@60.96,134.772
NetCON2_3: CON2.3 MOV2.1 RL2.3 Rsub2.2 | length 22.8
  Bottom Layer w2: 66.7,134.112 66.7,119.685 70.485,115.9 Rsub2.2@70.485,112.928
NetCON3_1: CON3.1 RL3.2 | length 13.7
  Bottom Layer w2: RL3.2@74.828,119.685 74.828,133.401
NetCON3_2: CON3.2 Csub3.2 MOV3.2 RL3.1 | length 29.5
  Bottom Layer w2: RL3.1@81.28,105.308 CON3.2@81.28,134.772
NetCON3_3: CON3.3 MOV3.1 RL3.3 Rsub3.2 | length 22.8
  Bottom Layer w2: CON3.3@87.02,134.112 87.02,119.685 90.805,115.9 Rsub3.2@90.805,112.928
NetCON4_1: CON4.1 RL4.2 | length 13.7
  Bottom Layer w2: RL4.2@95.148,119.685 95.148,133.401
NetCON4_2: CON4.2 Csub4.2 MOV4.2 RL4.1 | length 29.5
  Bottom Layer w2: RL4.1@101.6,105.308 CON4.2@101.6,134.772
NetCON4_3: CON4.3 MOV4.1 RL4.3 Rsub4.2 | length 22.8
  Bottom Layer w2: 107.34,134.112 107.34,119.685 111.125,115.9 Rsub4.2@111.125,112.928
NetCON5_1: CON5.1 RL5.2 | length 13.7
  Bottom Layer w2: RL5.2@115.468,119.685 115.468,133.401
NetCON5_2: CON5.2 Csub5.2 MOV5.2 RL5.1 | length 29.5
  Bottom Layer w2: RL5.1@121.92,105.308 CON5.2@121.92,134.772
NetCON5_3: CON5.3 MOV5.1 RL5.3 Rsub5.2 | length 22.8
  Bottom Layer w2: CON5.3@127.66,134.112 127.66,119.685 131.445,115.9 Rsub5.2@131.445,112.928
NetCON6_1: CON6.1 RL6.2 | length 13.7
  Bottom Layer w2: RL6.2@135.788,119.685 135.788,133.401
NetCON6_2: CON6.2 Csub6.2 MOV6.2 RL6.1 | length 29.5
  Bottom Layer w2: RL6.1@142.24,105.308 CON6.2@142.24,134.772
NetCON6_3: CON6.3 MOV6.1 RL6.3 Rsub6.2 | length 22.8
  Bottom Layer w2: 147.98,134.112 147.98,119.685 151.765,115.9 Rsub6.2@151.765,112.928
NetCON7_1: CON7.1 RL7.2 | length 13.7
  Bottom Layer w2: RL7.2@156.108,119.685 156.108,133.401
NetCON7_2: CON7.2 Csub7.2 MOV7.2 RL7.1 | length 29.5
  Bottom Layer w2: RL7.1@162.56,105.308 CON7.2@162.56,134.772
NetCON7_3: CON7.3 MOV7.1 RL7.3 Rsub7.2 | length 22.8
  Bottom Layer w2: CON7.3@168.3,134.112 168.3,119.685 172.085,115.9 Rsub7.2@172.085,112.928
NetCON8_1: CON8.1 RL8.2 | length 13.7
  Bottom Layer w2: RL8.2@176.428,119.685 176.428,133.401
NetCON8_2: CON8.2 Csub8.2 MOV8.2 RL8.1 | length 29.5
  Bottom Layer w2: RL8.1@182.88,105.308 CON8.2@182.88,134.772
NetCON8_3: CON8.3 MOV8.1 RL8.3 Rsub8.2 | length 22.8
  Bottom Layer w2: 188.62,134.112 188.62,119.685 192.405,115.9 Rsub8.2@192.405,112.928
NetCsub1_1: Csub1.1 Rsub1.1 | length 5.3
  Bottom Layer w2: Rsub1.1@50.038,123.444 Csub1.1@50.038,128.778
NetCsub2_1: Csub2.1 Rsub2.1 | length 5.3
  Bottom Layer w2: Csub2.1@70.307,128.473 70.612,128.168 Rsub2.1
NetCsub3_1: Csub3.1 Rsub3.1 | length 5.5
  Bottom Layer w2: Csub3.1@90.449,128.702 90.83,128.321 Rsub3.1
NetCsub4_1: Csub4.1 Rsub4.1
NetCsub5_1: Csub5.1 Rsub5.1
NetCsub6_1: Csub6.1 Rsub6.1 | length 5.5
  Bottom Layer w2: Rsub6.1 151.765,128.702 Csub6.1@151.79,128.727
NetCsub7_1: Csub7.1 Rsub7.1 | length 5.6
  Bottom Layer w2: Rsub7.1 172.009,128.829 Csub7.1
NetCsub8_1: Csub8.1 Rsub8.1 | length 5.3
  Bottom Layer w2: Rsub8.1 Csub8.1@192.253,128.549
NetD11_1: D11.A E1.K Q11.2 RL1.4 | length 25.9
  Top Layer w1: D11.A 46.126,99.06 ; E1.K D11.A@42.227,98.938 ; Q11.2 46.101,90.805 46.38,91.084 RL1.4
NetD12_1: D12.A E2.K Q12.2 RL2.4 | length 25.4
  Top Layer w0.5: E2.K@62.547,96.52 D12.A@62.547,98.938
  Top Layer w0.8: Q12.2 66.04,90.678 66.7,91.338 RL2.4
  Top Layer w1: D12.A@62.425,99.06 66.446,99.06
NetD13_1: D13.A E3.K Q13.2 RL3.4 | length 25.4
  Top Layer w0.5: E3.K@82.867,96.52 D13.A@82.867,98.938
  Top Layer w0.8: Q13.2@84.709,90.678 86.36,90.678 87.02,91.338 RL3.4
  Top Layer w1: D13.A@82.745,99.06 86.766,99.06
NetD14_1: D14.A E4.K Q14.2 RL4.4 | length 25.4
  Top Layer w0.5: E4.K@103.188,96.52 D14.A@103.188,98.938
  Top Layer w0.8: Q14.2 106.68,90.678 107.34,91.338 RL4.4
  Top Layer w1: D14.A@103.065,99.06 107.086,99.06
NetD15_1: D15.A E5.K Q15.2 RL5.4 | length 25.4
  Top Layer w0.5: E5.K@123.507,96.52 D15.A@123.507,98.938
  Top Layer w0.8: Q15.2 127,90.678 127.66,91.338 RL5.4
  Top Layer w1: D15.A@123.385,99.06 127.406,99.06
NetD16_1: D16.A E6.K Q16.2 RL6.4 | length 25.4
  Top Layer w0.5: E6.K@143.827,96.52 D16.A@143.827,98.938
  Top Layer w0.8: Q16.2 147.32,90.678 147.98,91.338 RL6.4
  Top Layer w1: D16.A@143.705,99.06 147.726,99.06
NetD17_1: D17.A E7.K Q17.2 RL7.4 | length 25.4
  Top Layer w0.5: E7.K@164.147,96.52 D17.A@164.147,98.938
  Top Layer w0.8: Q17.2 167.64,90.678 168.3,91.338 RL7.4
  Top Layer w1: D17.A@164.025,99.06 168.046,99.06
NetD18_1: D18.A E8.K Q18.2 RL8.4 | length 25.4
  Top Layer w0.5: E8.K@184.468,96.52 D18.A@184.468,98.938
  Top Layer w0.8: Q18.2 187.96,90.678 188.62,91.338 RL8.4
  Top Layer w1: D18.A@184.345,99.06 188.366,99.06
NetE1_A: E1.A Rrl13.1 | length 2.6
  Top Layer w1: Rrl13.1 E1.A
NetE2_A: E2.A Rrl23.1 | length 2.6
  Top Layer w0.5: Rrl23.1 E2.A@60.642,96.52
NetE3_A: E3.A Rrl33.1 | length 2.6
  Top Layer w0.5: Rrl33.1 E3.A@80.962,96.52
NetE4_A: E4.A Rrl43.1 | length 2.6
  Top Layer w0.5: Rrl43.1 E4.A@101.282,96.52
NetE5_A: E5.A Rrl53.1 | length 2.6
  Top Layer w0.5: Rrl53.1 E5.A@121.602,96.52
NetE6_A: E6.A Rrl63.1 | length 2.6
  Top Layer w0.5: Rrl63.1 E6.A@141.922,96.52
NetE7_A: E7.A Rrl73.1 | length 2.6
  Top Layer w0.5: Rrl73.1 E7.A@162.243,96.52
NetE8_A: E8.A Rrl83.1 | length 2.6
  Top Layer w0.5: Rrl83.1 E8.A@182.562,96.52
NetIN1_1: IN1.1 R01.1 | length 3.8
  Top Layer w0.5: R01.1 90.539,54.749 IN1.1
NetIN2_1: IN2.1 R03.1 | length 4.8
  Top Layer w0.5: R03.1 102.223,54.495 IN2.1
NetIN3_1: IN3.1 R05.1@110.058,54.645 | length 4.9
  Top Layer w0.5: R05.1@110.058,54.645 113.503,54.645 IN3.1
NetIN4_1: IN4.1 R07.1@121.488,55.28 | length 5.1
  Top Layer w0.5: R07.1@121.488,55.28 124.298,55.28 IN4.1
NetIN5_1: IN5.1 R09.1@132.918,55.28 | length 5.1
  Top Layer w0.5: R09.1@132.918,55.28 135.728,55.28 IN5.1
NetIN6_1: IN6.1 R11.1@144.348,55.28 | length 5.8
  Top Layer w0.5: R11.1@144.348,55.28 147.793,55.28 IN6.1
NetIN7_1: IN7.1 R13.1@157.048,55.28 | length 5.8
  Top Layer w0.5: R13.1@157.048,55.28 160.493,55.28 IN7.1
NetIN8_1: IN8.1 R15.1@169.748,55.28 | length 5.8
  Top Layer w0.5: R15.1@169.748,55.28 173.193,55.28 IN8.1
NetPW_2: PW.K R21.1@67.675,70.677 | length 5.4
  Top Layer w0.635: R21.1@67.675,70.677 67.802,70.804 PW.K
NetQ11_1: Q11.1 Rrl11.2 Rrl12.2 | length 5.3
  Top Layer w0.5: Rrl11.2 36.31,91.77 Q11.1
NetQ12_1: Q12.1 Rrl21.2 Rrl22.2 | length 5
  Top Layer w0.5: Rrl21.2 57.162,91.643 Q12.1
NetQ13_1: Q13.1 Rrl31.2 Rrl32.2 | length 5
  Top Layer w0.5: Rrl31.2@77.47,91.655 77.482,91.643 Q13.1@82.423,91.643
NetQ14_1: Q14.1 Rrl41.2 Rrl42.2 | length 5
  Top Layer w0.5: Rrl41.2@97.79,91.655 97.802,91.643 Q14.1
NetQ15_1: Q15.1 Rl52.2 Rrl51.2 | length 5
  Top Layer w0.5: Rrl51.2@118.11,91.655 118.122,91.643 Q15.1
NetQ16_1: Q16.1 Rrl61.2 Rrl62.2 | length 5
  Top Layer w0.5: Rrl61.2@138.43,91.655 138.442,91.643 Q16.1
NetQ17_1: Q17.1 Rrl71.2 Rrl72.2 | length 5
  Top Layer w0.5: Rrl71.2@158.75,91.655 158.762,91.643 Q17.1
NetQ18_1: Q18.1 Rrl81.2 Rrl82.2 | length 5
  Top Layer w0.5: Rrl81.2@179.07,91.655 179.082,91.643 Q18.1
NetR31_1: R31.1@191,66 Run.K | length 4.2
  Top Layer w0.305: Run.K 190.397,66.603 R31.1@191,66
RELAY_1: Rrl11.1 U3.1 | length 97.7
  Top Layer w0.305: v2(35.306,89.916) 35.345,89.955 Rrl11.1 ; v2(122.911,83.744) 122.911,83.82 125.521,81.21 U3.1 U3.1@127.702,81.34
  Bottom Layer w0.305: v2(35.306,89.916) 35.052,89.662 52.07,89.662 54.61,87.122 65.862,87.122 67.64,85.344 121.31,85.344 v2(122.911,83.744)
RELAY_2: Rrl21.1 U3.32 | length 84.1
  Top Layer w0.305: v2(55.88,89.916) 55.919,89.955 Rrl21.1 ; v2(123.215,86.182) 126.788,82.61 U3.32 129.102,83.75 125.298,87.554
  Bottom Layer w0.305: v2(55.88,89.916) 65.735,89.916 69.469,86.182 v2(123.215,86.182)
RELAY_3: Rrl31.1 U3.28 | length 62
  Top Layer w0.305: v2(76.2,89.662) 76.366,89.828 Rrl31.1 ; v2(128.473,87.325) 128.575,87.427 129.87,87.427 132.302,84.995 U3.28
  Bottom Layer w0.305: v2(76.2,89.662) 78.537,87.325 v2(128.473,87.325) v2@128.473,87.147
RELAY_4: Rrl41.1 U3.27 | length 43.4
  Top Layer w0.305: v2(96.52,89.662) 97.624,89.662 Rrl41.1 ; v2(131.343,88.671) 131.343,88.646 133.102,86.887 U3.27
  Bottom Layer w0.305: v2(96.52,89.662) 97.511,88.671 v2(131.343,88.671)
RELAY_5: Rrl51.1 U3.26 | length 25.3
  Top Layer w0.305: v2(116.586,89.916) 117.768,89.916 Rrl51.1 ; v2(132.893,89.916) 133.902,88.907 U3.26
  Bottom Layer w0.305: v2(116.586,89.916) v2(132.893,89.916)
RELAY_6: Rrl61.1 U3.25 | length 9.8
  Top Layer w0.305: U3.25 134.702,85.045 v2(134.925,85.268) v2@134.965,85.228 ; v2(136.906,89.916) 136.994,89.828 Rrl61.1
  Bottom Layer w0.305: v2(134.925,85.268) 134.925,87.935 v2(136.906,89.916)
RELAY_7: Rrl71.1 U3.24 | length 27.9
  Top Layer w0.305: U3.24 136.102,84.007 v2(137.287,85.192) ; v2(157.48,89.662) 157.646,89.828 Rrl71.1
  Bottom Layer w0.305: v2(137.287,85.192) 141.757,89.662 v2(157.48,89.662)
RELAY_8: Rrl81.1 U3.23 | length 47.4
  Top Layer w0.305: U3.23 137.458,80.41 144.424,87.376 v2(147.066,87.376) ; v2(177.546,89.662) 177.292,89.916 178.982,89.916 Rrl81.1
  Bottom Layer w0.305: v2(147.066,87.376) 175.26,87.376 v2(177.546,89.662)
RST: ISP.3 U3.29 | length 22.9
  Top Layer w0.305: U3.29 131.502,81.096 v2(132.664,79.934)
  Bottom Layer w0.305: v2(132.664,79.934) 143.561,79.934 144.729,78.765 ISP.3
SCK: EX_CON.6 ISP.2 Run.A U3.17 | length 68.5
  Top Layer w0.305: U3.17 151.593,75.61 152.603,74.6 152.603,73.406 ; ISP.2 148.539,70.282 151.46,70.282 152.603,71.425 152.603,73.406 ; EX_CON.6 152.679,73.33 152.603,73.406
VCC: C34.1@141.935,77.637 C35.1@124.028,77.383 EX_CON.7 F22.2 IN1.4 IN2.4 IN3.4 IN4.4 IN5.4 IN6.4 IN7.4 IN8.4 ISP.4 PW.A U3.4 U3.6 U3.18 | length 201.8
  Top Layer w0.305: C35.1@124.201,77.21 125.806,77.21 ; U3.4 126.46,78.81 125.806,78.156 125.806,77.21 ; U3.18 131.87,76.41 131.07,77.21 U3.6 125.806,77.21
  Top Layer w0.5: U3.18 140.708,76.41 C34.1@141.935,77.637
  Top Layer w0.635: F22.2 89.47,74.487 ; IN1.4 91.643,72.314 89.47,74.487 ; v2(113.665,76.454) 111.698,74.487 89.47,74.487 ; v2(121.539,77.597) 121.753,77.383 C35.1@124.028,77.383
  Bottom Layer w0.635: IN1.4 91.643,63.551 92.659,64.567 103.073,64.567 ; IN2.4 103.073,64.567 ; v2(113.665,76.454) 120.396,76.454 v2(121.539,77.597) ; IN3.4 114.503,64.567 ; IN4.4 125.933,64.313 126.187,64.567 ; IN5.4 137.363,64.567 ; IN6.4 149.428,64.186 ; IN7.4 162.128,64.44 162.001,64.567 ; IN8.4 174.828,64.186 174.447,64.567 162.001,64.567 ; 103.073,64.567 114.503,64.567 ; 114.503,64.567 126.187,64.567 ; 126.187,64.567 137.363,64.567 ; 137.363,64.567 162.001,64.567
XTAL1: C33.1 U3.7 XT.1 | length 14.8
  Top Layer w0.305: C33.1 118.606,73.164 XT.1 118.567,74.981 119.996,76.41 U3.7
XTAL2: C32.1 U3.8 XT.2 | length 9.4
  Top Layer w0.305: C32.1 123.647,70.067 XT.2 123.647,74.854 124.403,75.61 U3.8
pads on no net: C31.0 C31.1@139.268,77.637 C31.1@139.268,79.437 C32.0 C33.0 C34.0 C34.1@141.935,77.637 C34.1@141.935,79.437 C35.0 C35.1@124.028,77.383 C35.1@124.028,79.183 Crl1.0 Crl1.1@34.061,92.877 Crl1.1@34.061,94.677 Crl2.0 Crl2.1@54.356,92.877 Crl2.1@54.356,94.677 Crl3.0 Crl3.1@74.676,92.877 Crl3.1@74.676,94.677 Crl4.0 Crl4.1@95.25,92.877 Crl4.1@95.25,94.677 Crl5.0 Crl5.1@115.316,92.877 Crl5.1@115.316,94.677 Crl6.0 Crl6.1@135.89,92.877 Crl6.1@135.89,94.677 Crl7.0 Crl7.1@156.057,92.877 Crl7.1@156.057,94.677 Crl7.1@156.058,92.877 Crl7.1@156.058,94.677 Crl8.0 Crl8.1@176.377,92.877 Crl8.1@176.377,94.677 Crl8.1@176.378,92.877 Crl8.1@176.378,94.677 D11.0 D12.0 D13.0 D14.0 D15.0 D16.0 D17.0 D18.0 E1.0 E2.0 E3.0 E4.0 E5.0 E6.0 E7.0 E8.0 F21.0 F22.0 MOV1.0 MOV2.0 MOV3.0 MOV4.0 MOV5.0 MOV6.0 MOV7.0 MOV8.0 R01.0 R02.0 R03.0 R04.0 R04.1@110.058,60.265 R04.1@110.058,62.265 R05.0 R05.1@110.058,52.645 R05.1@110.058,54.645 R06.0 R06.1@121.488,60.265 R06.1@121.488,62.265 R07.0 R07.1@121.488,53.28 R07.1@121.488,55.28 R08.0 R08.1@132.918,60.265 R08.1@132.918,62.265 R09.0 R09.1@132.918,53.28 R09.1@132.918,55.28 R10.0 R10.1@144.348,60.265 R10.1@144.348,62.265 R11.0 R11.1@144.348,53.28 R11.1@144.348,55.28 R12.0 R12.1@157.048,60.265 R12.1@157.048,62.265 R13.0 R13.1@157.048,53.28 R13.1@157.048,55.28 R14.0 R14.1@169.748,60.265 R14.1@169.748,62.265 R15.0 R15.1@169.748,53.28 R15.1@169.748,55.28 R16.0 R16.1@182.448,60.265 R16.1@182.448,62.265 R21.0 R21.1@65.675,70.677 R21.1@65.675,70.678 R21.1@67.675,70.677 R21.1@67.675,70.678 R31.0 R31.1@191,66 R31.1@193,66 Rl52.0 Rrl11.0 Rrl12.0 Rrl13.0 Rrl21.0 Rrl22.0 Rrl23.0 Rrl31.0 Rrl32.0 Rrl33.0 Rrl41.0 Rrl42.0 Rrl43.0 Rrl51.0 Rrl53.0 Rrl61.0 Rrl62.0 Rrl63.0 Rrl71.0 Rrl72.0 Rrl73.0 Rrl81.0 Rrl82.0 Rrl83.0
copper on no net: | length 3.9
  Top Layer w0.254: 187,69.397 187,73.33

## Polygon pours and split planes (outlines as drawn)
GND on Top Layer "Bottom Layer-No Net" (solid, pour order 0): 200,57.5 85,57.5 85,42.5 25,42.5 25,91.5 200,92
GND on Bottom Layer "Bottom Layer-No Net" (solid, pour order 2): 25,42.5 85.5,42.5 85,43 85,57.5 200,57.5 200,93 25.5,93 25,93

## Keep-outs
Keep-Out Layer:
  the board outline again, w0.254

## Text inside footprints (layer, text, board x,y; h text height)
ISP: Top Overlay "6" at 142.697,69.52 h1.27 r180; Top Overlay "3" at 142.697,72.06 h1.27 r180; Top Overlay "1" at 151.841,72.06 h1.27 r180; Top Overlay "4" at 152.349,69.52 h1.27 r180